# Altium PCB Odin_0.pcbdoc (part 3 of 3)
Units mil, origin at the board's own origin, x right, y up, seen from the top; angles counter-clockwise.
Board outline 3937 x 3937 mil, 4 copper layers (Top Layer, mSIG, mPWR, Bottom Layer), stack 62.3 mil thick; 149 components, 218 nets, 830 pads, 480 vias.
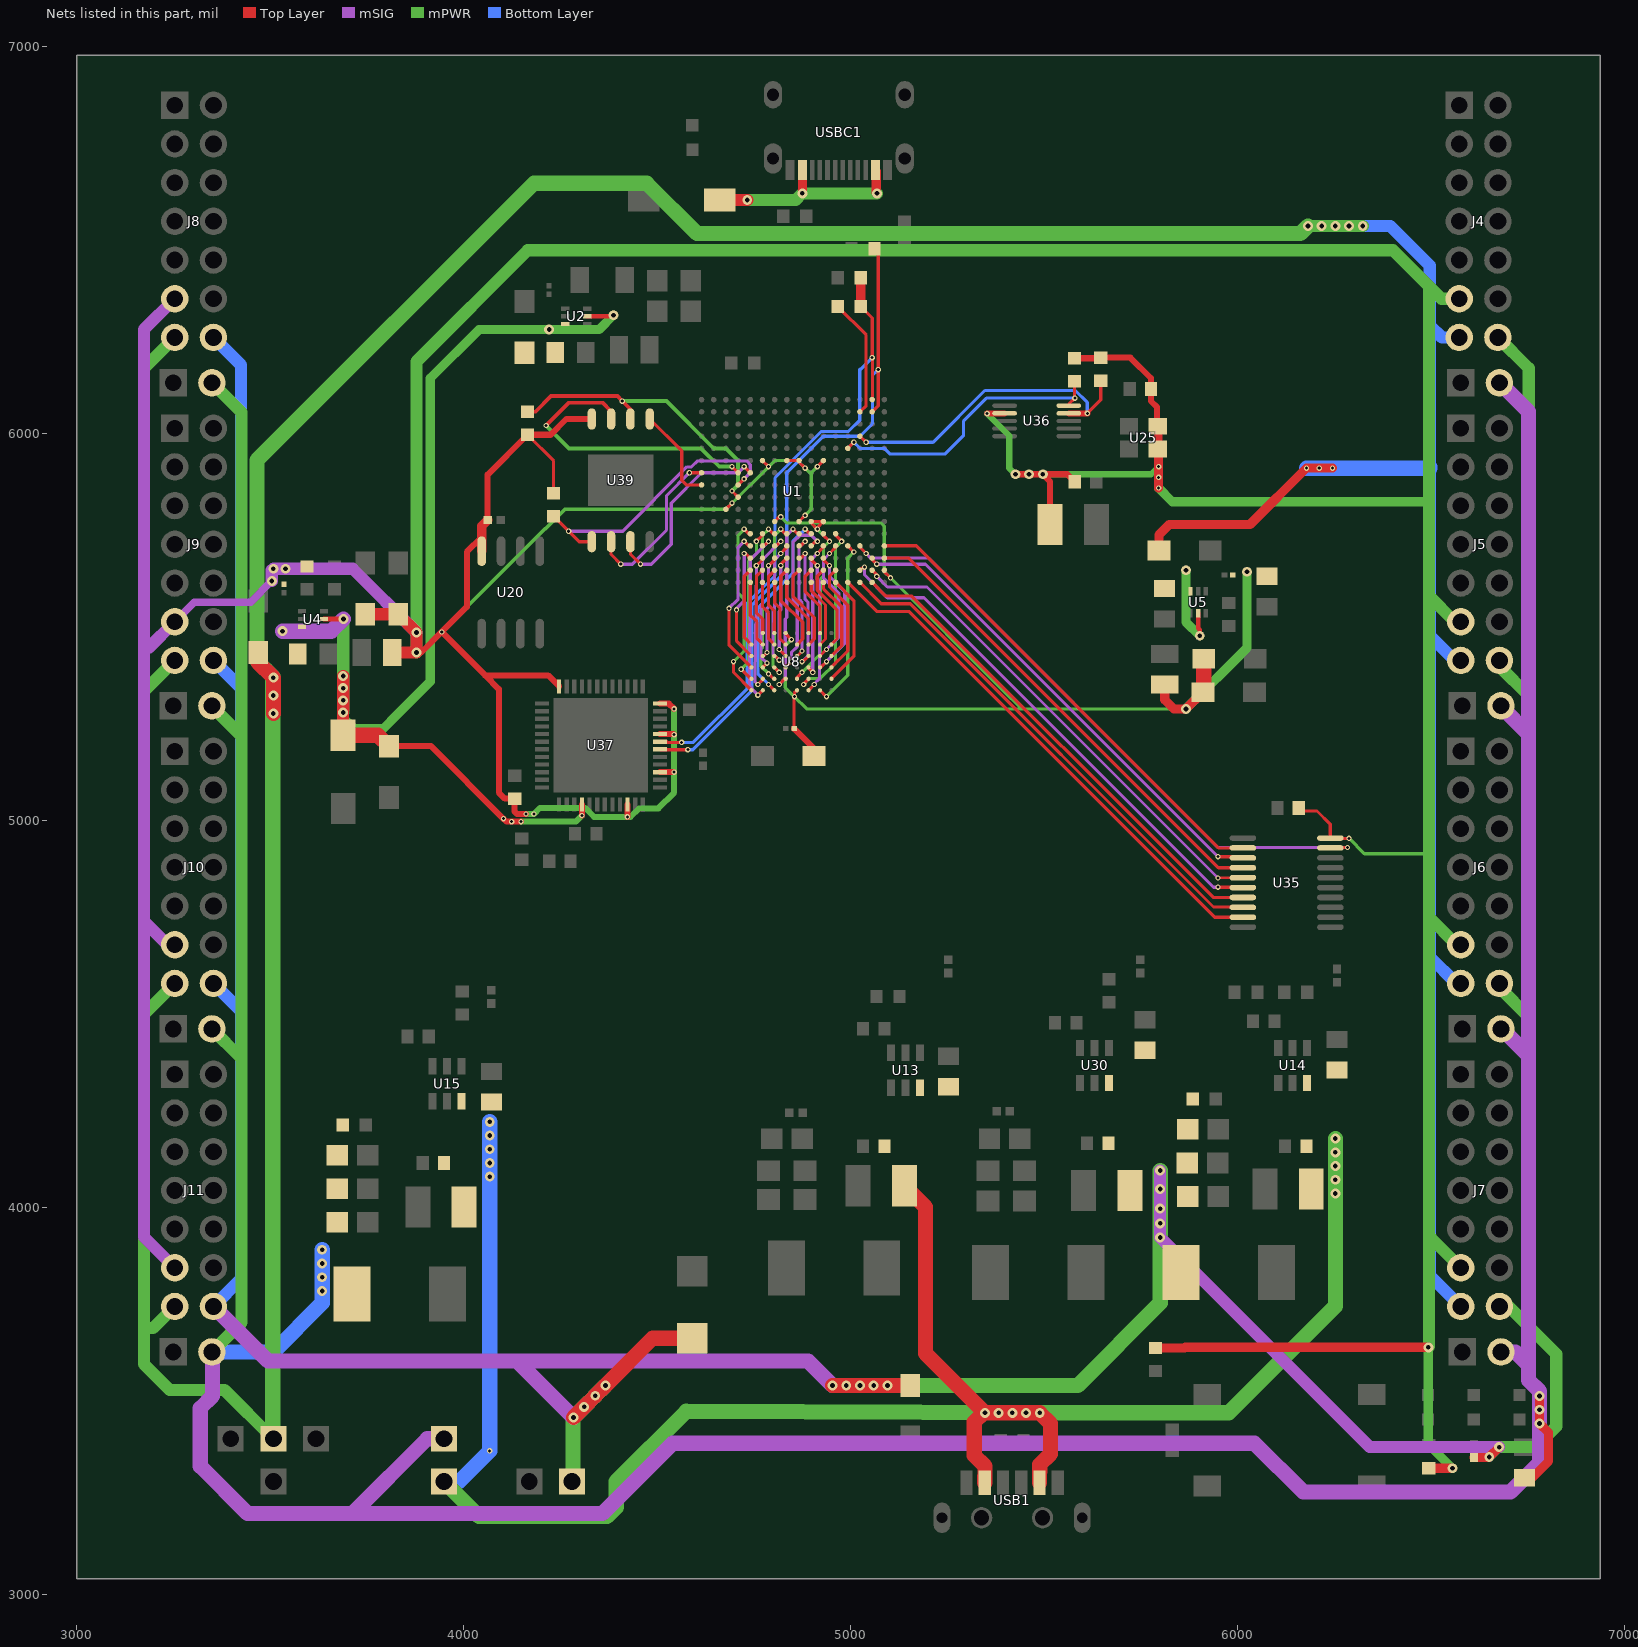
[diagram p5: the nets of this part, all layers, seen from the top]

## Via types
v1: diameter 13.8, hole 7.9, Top Layer to Bottom Layer, 291 vias
v2: diameter 25.6, hole 12.2, Top Layer to Bottom Layer, 176 vias
v3: diameter 24, hole 12, Top Layer to Bottom Layer, 13 vias

## Nets (pads, with @x,y where several pads share a name; then routed paths per layer and width w, separated by ;. In a path a pad name is that pad's centre, name@x,y a point inside that pad or via, vN(x,y) a via of type N, cw(c..) or ccw(c..) an arc to the next point about the centre after c; other vN are vias at no path point) (continued)
P2.5V: C13.1 C14.2 C58.2 C59.1 C60.1 L12.2 R110.2 U1.A15 U1.F11 U1.G11 U1.K11 U8.D6 U8.E1 | length 3152.8
  Top Layer w8.3: U1.K11@4803.2,5773 4815,5784.9 v1(4818.9,5784.9) ; U8.D6@4831.7,5484.7 4831.7,5482.7 v1(4846.4,5467.9) ; C14.2@4853.3,5237.6 4853.3,5319.3 v1(4854.3,5320.3) 4854.3,5330.1 U8.E1@4861.2,5337 ; U1.F11@4929.1,5769.1 4925.2,5773 U1.G11@4897.6,5773 4897.6,5769.1 v1(4913.4,5753.4) 4913.4,5757.3 U1.F11@4929.1,5773 ; U1.A15@5086.6,5647.1 5086.6,5643.2 v1(5102.4,5627.4)
  Top Layer w15.7: C14.2@4853.3,5237.6 4905,5185.9 C13.1@4905,5166.8
  Top Layer w23.6: L12.2@5811,5351.8 5811,5312.4 5834.6,5288.8 v2(5866.1,5288.8) C60.1@5910,5332.1
  Top Layer w39.4: C60.1@5910,5332.1 5912,5334.2 C59.1@5912,5418.7
  mPWR w8.3: v1(4818.9,5784.9) 4834.6,5769.1 5078.7,5769.1 5086.6,5761.3 5086.6,5643.2 v1(5102.4,5627.4) 5389.8,5340 5440.9,5288.8 ; v1(4846.4,5467.9) 4830.7,5452.2 4830.7,5343.9 v1(4854.3,5320.3) 4885.8,5288.8 5440.9,5288.8 ; 4897.9,5769.1 v1(4913.4,5753.4) 4929.2,5737.6 ; v2(5866.1,5288.8) 5440.9,5288.8
  mPWR w23.6: v2(5866.1,5288.8) 6023.6,5446.3 v2(6023.6,5643.1)
P3.3V: C8.1 C9.1 C12.2 C15.2 C73.2 C75.2 C76.2 J4.11 J5.11 J6.11 J7.11 J8.11 J9.11 J10.11 J11.11 L3.2 R3.2 R4.2 R5.2 R10.1 R100.2 R101.2 R106.2 R107.2 R109.2 U1.F6 U1.H6 U1.H11 U1.J6 U1.L6 U1.P10 U20.8 U25.1 U25.4 U35.20 U36.7 U37.3 U37.8 U37.12 U37.24 U37.46 U39.8 | length 18242.8
  Top Layer w8.3: R3.2@4164.5,5997.2 4232,5929.7 R106.2@4232,5846 ; U1.P10@4677.2,5804.5 v1(4692.9,5820.3) ; U1.L6@4771.7,5930.5 v1(4787.4,5914.8) ; U1.J6@4834.6,5930.5 4866.1,5930.5 4866.1,5926.6 v1(4881.9,5910.9) ; U1.H11@4866.1,5773 v1(4881.9,5788.8) ; v1(4913.4,5914.8) U1.F6@4929.1,5930.5 ; C73.2@6157.5,5025 6204.6,5025 6239,4990.7 U35.20@6239,4955.1 6239.9,4954.2 v1(6287.4,4954.2)
  Top Layer w15.7: v2(3877.9,5434.5) 3889.8,5434.5 v1(3942.9,5487.6) ; U20.8@4046.2,5732.6 4007.9,5694.3 4007.9,5552.6 v1(3942.9,5487.6) ; R10.1@4061.7,5777 4061.7,5894.4 R3.2@4164.5,5997.2 4224.2,5997.2 4264.9,6037.9 U39.8@4330.5,6037.9 ; v1(4160.8,5017.1) 4137.8,5017.1 4131.4,5023.5 R107.2@4131.4,5056.9 4105.9,5056.9 4090.5,5072.3 4090.5,5340 4055.1,5375.4 ; U37.24@4246.1,5347 4217.6,5375.4 4055.1,5375.4 ; v1(4422.6,5009.7) 4423.2,5010.3 U37.46@4423.2,5041.7 ; U37.3@4507,5125.4 v1@4543.3,5125.4 ; U37.8@4507,5223.8 4541.7,5223.8 v1(4543.3,5222.3) ; U37.12@4507,5302.6 4529.5,5302.6 v1(4543.3,5288.8) ; v1(5352.4,6051.7) 5396.4,6051.7 U36.7@5397.2,6052.6 ; v2(5425.2,5895.1) v2(5460.6,5895.1) v2(5496.1,5895.1) ; C76.2@5515.1,5765.2 5515.1,5876.1 v2(5496.1,5895.1) ; R101.2@5578,6194.9 5644.2,6194.9 R100.2@5645.7,6196.4 5722.3,6196.4 5775.6,6143.1 C15.2@5775.6,6115.6 5775.6,6084.1 5791.3,6068.3 5791.3,6021.1 U25.1@5793.3,6019.1 ; C75.2@5578.7,5875.4 5559.1,5895.1 v2(5496.1,5895.1) ; v1(3942.9,5487.6) 4055.1,5375.4
  Top Layer w23.6: U20.8@4046.2,5696.4 4046.2,5732.6 4046.2,5761.5 R10.1@4061.7,5777 ; R4.2@5787.4,3637.4 5862.2,3637.4 5864,3639.2 v2(6492.1,3639.2) ; U25.1@5793.3,6019.1 U25.4@5793.3,5960.1 5795.3,5958.1 v1(5795.3,5914.8) v1(5795.3,5887.2) v1(5795.3,5859.7) ; R109.2@6492.6,3326.3 6493.1,3326.8 v2(6554.4,3326.8)
  Top Layer w31.5: C8.1@3745.4,5533.3 C9.1@3830.7,5533.4 v2(3877.9,5486.2) v2(3877.9,5434.5) L3.2@3814.9,5434.5
  mSIG w19.7: J9.11@3253.1,5514 3304,5564.8 3449.3,5564.8 v2(3503.9,5619.5)
  mSIG w31.5: J11.11@3253.1,3844.7 3173.2,3924.6 3173.2,4740.8 ; J10.11@3253.1,4679.4 3234.6,4679.4 3173.2,4740.8 ; J9.11@3253.1,5514 3185.4,5446.3 3173.2,5446.3 ; J8.11@3253.1,6348.6 3252.8,6348.6 3173.2,6269.1 3173.2,5446.3 ; v2(3503.9,5619.5) 3503.9,5647.1 v2(3507.9,5651) v2(3539.4,5651) 3713.1,5651 v2(3877.9,5486.2) ; 3173.2,4740.8 3173.2,5446.3
  mPWR w8.3: v1(4692.9,5820.3) v1@4787.4,5914.7 ; v1(4787.4,5914.8) 4803.1,5930.5 4862.1,5930.5 v1(4881.9,5910.9) 4897.6,5895.1 4897.6,5804.5 v1(4881.9,5788.8) ; 4897.7,5895.1 4897.7,5899.1 v1(4913.4,5914.8) ; v1(6287.4,4954.2) 6327,4914.6 6494.3,4914.6
  mPWR w9.8: v1(3942.9,5487.6) 4209.5,5754.2 4211.4,5754.2 4261.8,5804.5 4677.2,5804.5 v1(4692.9,5820.3)
  mPWR w15.7: v1(4160.8,5017.1) v1(4181.1,5017.1) 4196.8,5032.9 4313.3,5032.9 4336.4,5009.7 v1(4422.6,5009.7) 4430.7,5009.7 4452.9,5031.9 4502.9,5031.9 4543.3,5072.3 v1(4543.3,5125.5) v1(4543.3,5222.3) v1(4543.3,5288.8) ; v1(5352.4,6051.7) 5409.4,5994.6 5409.4,5910.8 v2(5425.2,5895.1) ; v2(5496.1,5895.1) 5775.6,5895.1 v1@5795.2,5914.7
  mPWR w23.6: v1@5795.3,5914.7 v1(5795.3,5887.2) v1(5795.3,5859.7) 5830.7,5824.2 6494.3,5824.2 ; v2(6492.1,3639.2) 6492.1,3389.1 v2(6554.4,3326.8)
  mPWR w31.5: v2(3877.9,5434.5) v2(3877.9,5486.2) 3877.9,6186.5 4165.3,6473.9 6400.7,6473.9 6494.3,6380.3 ; v2(6492.1,3639.2) 6494.3,3641.4 6494.3,3921.2 ; J4.11@6572,6348.6 6525.9,6348.6 6494.3,6380.3 ; J7.11@6576,3844.7 6499.5,3921.2 6494.3,3921.2 ; J6.11@6576,4679.4 6565.3,4679.4 6494.3,4750.4 ; J5.11@6576,5514 6560.6,5514 6494.3,5580.3 ; 6494.3,3921.2 6494.3,4750.4 ; 6494.3,4750.4 6494.3,4914.6 6494.3,5580.3 ; 6494.3,5580.3 6494.3,5824.2 6494.3,6380.3
P5V: C1.1 C3.1 C17.1 C61.1 D5.1 J4.13 J5.13 J6.13 J7.13 J8.13 J9.13 J10.13 J11.13 P5.1 R7.1 R42.1 R43.1 U2.3 U2.5 U4.3 U4.5 U5.3 U5.5 U37.40 | length 16924.1
  Top Layer w11.8: U4.5@3638.7,5521.1 v2(3689,5521.1) ; U2.5@4319.1,6303.1 4383.7,6303.1 v2@4386.5,6305.9 ; U5.5@5897.6,5535.9 5897.6,5497.5 5901.6,5493.5 v2(5901.6,5477.8)
  Top Layer w15.7: C17.1@3806.4,5192.4 3915.3,5192.4 v1(4102.4,5005.3) 4110.2,4997.5 v1(4123.6,4997.5) v1(4147.9,4997.5) ; v1(4305.1,5013.2) U37.40@4305.1,5041.7
  Top Layer w23.6: C61.1@5795.8,5698.3 5795.8,5738.2 5822.8,5765.2 6031.5,5765.2 v1(6177.2,5910.8) v1(6210.4,5910.8) v1(6244.7,5910.8)
  Top Layer w31.5: D5.1@3687.9,5220.7 3688.2,5342.5 v2(3688.3,5374)
  Top Layer w39.4: C3.1@3468.5,5435 3468.5,5409 3507.9,5369.6 3507.9,5323.5 v2@3507.9,5277 ; D5.1@3687.9,5220.6 3778.1,5220.6 C17.1@3806.4,5192.4
  mSIG w39.4: v2(3531.5,5489.6) 3657.5,5489.6 v2(3689,5521.1)
  mPWR w15.7: v1(4147.9,4997.5) 4289.4,4997.5 v1(4305.1,5013.2)
  mPWR w23.6: v2@3688.3,5279.6 3688.3,5265.9 3716.5,5237.6 3791.3,5237.6 3826.8,5273.1 3913.4,5359.7 3913.4,6143.2 4039.4,6269.1 v2(4220.5,6269.1) 4349.7,6269.1 v2@4386.5,6305.9 ; v2(5866.1,5647.1) 5866.1,5513.2 v2(5901.6,5477.8)
  mPWR w31.5: J11.13@3253.1,3744.7 3197.2,3688.8 3173.2,3688.8 ; J10.13@3253.1,4579.4 3173.2,4499.4 ; J9.13@3253.1,5414 3173.2,5334 ; J8.13@3253.1,6248.6 3173.2,6168.7 3173.2,5334 ; P5.1@3506.5,3404.3 3381.9,3529 3240.1,3529 3173.2,3595.9 3173.2,3688.8 ; v2(3688.3,5279.5) v2(3688.3,5311) v2(3688.3,5342.5) v2(3688.3,5374) 3688.3,5520.4 v2(3689,5521.1) ; v2(6181.1,6536.8) v2(6216.5,6536.8) v2(6252,6536.8) v2(6287.4,6536.8) v2(6322.8,6536.8) ; 3173.2,3688.8 3173.2,4499.4 ; 3173.2,4499.4 3173.2,5334
  mPWR w39.4: P5.1@3507.9,3403 3506.5,3404.3 3506.5,5372.3 3465.6,5413.2 3465.6,5931.6 4181.1,6647.1 4472.4,6647.1 4602.4,6517.1 6161.4,6517.1 v2@6181.1,6536.9
  Bottom Layer w31.5: v2(6181.1,6536.8) v2(6216.5,6536.8) v2(6252,6536.8) v2(6287.4,6536.8) v2(6322.8,6536.8) ; v2@6322.8,6536.9 6393.7,6536.9 6496.1,6434.5 6496.1,6280 6527.5,6248.6 J4.13@6572,6248.6 ; 6496.1,5910.8 6496.1,5478.6 ; 6496.1,5913.7 6496.1,6278.6 ; J7.13@6576,3744.7 6496.1,3824.6 6496.1,4648.6 ; J6.13@6576,4579.4 6565.3,4579.4 6496.1,4648.6 ; J5.13@6576,5414 6560.6,5414 6496.1,5478.6 ; 6496.1,4648.6 6496.1,5478.6
  Bottom Layer w39.4: v1(6177.2,5910.8) v1(6210.4,5910.8) v1(6244.7,5910.8) 6496.1,5910.8 6496.1,5913.7
  other v2: 3507.8,5276.9 3507.8,5323.5 3507.8,5369.6 4386.5,6306
P9V: C6.1 C28.1 C43.2 C46.2 C47.2 C64.2 D6.1 J4.14 J5.14 J6.14 J7.14 J8.14 J9.14 J10.14 J11.14 L6.1 P7.1 R16.2 R34.2 R48.2 U30.3 | length 11775.9
  Top Layer w23.6: R34.2@6610.2,3354.4 6648.3,3354.4 v2(6649.6,3355.7) v2(6675.1,3381.3)
  Top Layer w39.4: v2(4283.5,3458.1) v2(4310.9,3485.5) v2(4339.5,3514.1) v2(4366.1,3540.8) 4488.2,3662.8 D6.1@4590.6,3662.8 ; v2(4952.7,3540.8) v2(4988.1,3540.8) v2(5023.6,3540.8) v2(5059,3540.8) v2(5094.5,3540.8) 5150.1,3540.8 C6.1@5153.5,3544.2
  mSIG w8.3: v2(6649.6,3355.7) v2(6675.1,3381.3)
  mSIG w31.5: v2(5799.2,4095.9) v2(5799.2,4048.5) v2(5799.2,3997.4) v2(5799.2,3959.5) v2(5799.2,3922.7) 6340.6,3381.3 v2(6675.1,3381.3)
  mSIG w39.4: J11.14@3353.1,3744.7 3494.1,3603.8 4137.8,3603.8 ; v2(4283.5,3458.1) 4137.8,3603.8 ; v2(5094.5,3540.8) v2(5059,3540.8) v2(5023.6,3540.8) v2(4988.1,3540.8) v2(4952.7,3540.8) 4889.7,3603.8 4137.8,3603.8
  mPWR w23.6: v2(6649.6,3355.7) v2(6675.1,3381.3)
  mPWR w31.5: J4.14@6672,6248.6 6751.7,6168.9 6751.7,5322.9 ; v2(6675.1,3381.3) 6769.6,3381.3 6822.8,3434.4 6822.8,3622 6751.7,3693 ; J7.14@6676,3744.7 6700,3744.7 6751.7,3693 ; J6.14@6676,4579.4 6676,4568.7 6751.7,4493 ; J5.14@6676,5414 6676,5398.6 6751.7,5322.9 ; 6751.7,3693 6751.7,4493 ; 6751.7,4493 6751.7,5322.9
  mPWR w39.4: P7.1@4279.5,3292.7 4281.9,3295.1 4281.9,3456.5 v2(4283.5,3458.1) v2(4310.9,3485.5) v2(4339.5,3514.1) v2(4366.1,3540.8) ; v2(4952.7,3540.8) v2(4988.1,3540.8) v2(5023.6,3540.8) v2(5059,3540.8) v2(5094.5,3540.8) 5586.6,3540.8 5799.2,3753.4 v2(5799.2,3922.7) v2(5799.2,3959.5) v2(5799.2,3997.4) v2(5799.2,4048.5) v2(5799.2,4095.9)
  Bottom Layer w31.5: J11.14@3353.1,3744.7 3424.5,3816.1 3424.5,4508 ; J10.14@3353.1,4579.4 3424.5,4508 ; J9.14@3353.1,5414 3424.5,5342.6 ; J8.14@3353.1,6248.6 3424.5,6177.3 3424.5,5342.6 ; 3424.5,4489.5 3424.5,4508 ; 3424.5,4508 3424.5,5342.6
P12V: C34.1 C48.2 C49.2 H5.2 H6.2 H7.2 H8.2 H9.2 H10.2 H11.2 H12.2 L7.1 P8.1 R103.2 U18.2 | length 10924.8
  Top Layer w23.6: R103.2@6740.6,3302.4 6760.2,3302.4 6803.1,3345.3 6803.1,3418.7 v2(6779.5,3442.3) v2(6779.5,3477.8) v2(6779.5,3513.2)
  mSIG w39.4: H12.2@3349.2,3627.4 3350.4,3626.2 3350.4,3513.2 3318.9,3481.7 3318.9,3332.1 3440.9,3210.1 3712.6,3210.1 ; P8.1@3948.8,3403 3905.5,3403 3712.6,3210.1 ; H8.2@6679.9,3627.4 6717.3,3627.4 6751.3,3593.4 ; H7.2@6679.9,4464.8 6751.3,4393.4 ; H6.2@6679.9,5294.7 6751.3,5223.3 ; H5.2@6679.9,6128.6 6751.3,6057.2 6751.3,5223.3 ; 3712.6,3210.1 4358.3,3210.1 4539.4,3391.2 6043.3,3391.2 6169.3,3265.2 6704.7,3265.2 6779.5,3340 v2(6779.5,3442.3) v2(6779.5,3477.8) 6779.5,3525.8 6751.3,3554.1 6751.3,3593.4 ; 6751.3,3593.4 6751.3,4393.4 ; 6751.3,4393.4 6751.3,5223.3
  mPWR w31.5: H12.2@3349.2,3627.4 3425.2,3703.4 3425.2,4388.8 ; H11.2@3349.2,4462 3422.5,4388.8 3425.2,4388.8 ; H10.2@3349.2,5294.7 3425.2,5218.7 ; H9.2@3349.2,6131.3 3425.2,6055.3 3425.2,5218.7 ; 3425.2,4388.8 3425.2,5218.7
  Bottom Layer w39.4: H12.2@3349.2,3627.4 3507.9,3627.4 3633.9,3753.4 v2(3633.9,3784.9) v2(3633.9,3820.3) v2(3633.9,3855.7) v2(3633.9,3891.2)
QSPI_D2: U1.M7 U39.3 | length 525.5
  Top Layer w8.3: U39.3@4430.5,5720.8 4430.5,5689 v1(4456.7,5662.8) ; v1(4724.4,5914.8) U1.M7@4740.2,5899
  mSIG w8.3: v1(4456.7,5662.8) 4484.2,5662.8 4535.8,5714.4 4535.8,5820.6 4614.2,5899 4708.7,5899 v1(4724.4,5914.8)
QSPI_D3: U1.N7 U39.7 | length 768.2
  Top Layer w8.3: v1(4692.9,5914.8) U1.N7@4708.7,5899
  Top Layer w9.8: v1(4212.6,6021.1) 4271.7,6080.1 4358.3,6080.1 4380.5,6057.9 U39.7@4380.5,6037.9
  mPWR w9.8: v1(4212.6,6021.1) 4271.7,5962 4613,5962 4660.2,5914.8 v1(4692.9,5914.8)
RAM_A0: U1.M13 U8.A3 | length 386.8
  Top Layer w8.3: v1(4685,5548.6) 4685,5454.2 U8.A3@4743.1,5396.1 ; v1(4724.4,5721.9) 4736.2,5710.1 U1.M13@4740.2,5710.1
  mSIG w8.3: v1(4685,5548.6) 4708.7,5572.3 4708.7,5706.1 v1(4724.4,5721.9)
RAM_A1: U1.M14 U8.A4 | length 309.5
  Top Layer w8.3: v1(4704.7,5544.7) 4704.7,5464 U8.A4@4743.1,5425.6 ; v1(4724.4,5690.4) 4728.3,5690.4 U1.M14@4740.2,5678.6
  mSIG w8.3: v1(4704.7,5544.7) 4704.7,5548.6 4724.4,5568.3 v1(4724.4,5690.4)
RAM_A2: U1.M15 U8.A5 | length 206.2
  Top Layer w8.3: U1.M15@4740.2,5647.1 4724.4,5631.3 4724.4,5473.9 U8.A5@4743.1,5455.2
RAM_A3: U1.K13 U8.B3 | length 378.7
  Top Layer w8.3: U8.B3@4772.6,5396.1 v1(4783.5,5406.9) ; U1.K13@4803.2,5710.1 4807.1,5710.1 v1(4818.9,5721.9)
  mSIG w8.3: v1(4783.5,5406.9) 4767.7,5422.7 4767.7,5556.5 4771.7,5560.5 4771.7,5674.7 v1(4818.9,5721.9)
RAM_A4: U1.K14 U8.B4 | length 266.9
  Top Layer w8.3: U8.B4@4772.6,5425.6 4774.6,5425.6 v1(4783.5,5434.5) ; v1(4787.4,5658.9) 4803.2,5674.6 U1.K14@4803.2,5678.6
  mSIG w8.3: v1(4783.5,5434.5) 4783.5,5548.7 4787.4,5552.6 v1(4787.4,5658.9)
RAM_A5: U1.J12 U8.C3 | length 423.6
  Top Layer w8.3: U8.C3@4802.2,5396.1 v1(4815,5383.3) ; v1(4818.9,5753.4) 4830.7,5741.5 U1.J12@4834.6,5741.5
  mPWR w8.3: v1(4815,5383.3) 4799.2,5399.1 4799.2,5450.2 4803.1,5454.2 4803.1,5737.7 v1(4818.9,5753.4)
RAM_A6: U1.J13 U8.C4 | length 333.8
  Top Layer w8.3: U8.C4@4802.2,5425.6 4804.1,5425.6 v1(4815,5414.8) ; v1(4818.9,5690.4) 4834.6,5706.1 U1.J13@4834.6,5710.1
  mSIG w8.3: v1(4815,5414.8) 4799.2,5430.5 4799.2,5544.7 4803.1,5548.6 4803.1,5674.6 v1(4818.9,5690.4)
RAM_A7: U1.J14 U8.D4 | length 268
  Top Layer w8.3: v1(4815,5442.3) U8.D4@4831.7,5425.6 ; v1(4818.9,5658.9) 4818.9,5662.8 U1.J14@4834.6,5678.6
  mSIG w8.3: v1(4815,5442.3) 4815,5540.8 4818.9,5544.7 v1(4818.9,5658.9)
RAM_A8: U1.E16 U8.H2 | length 292.7
  Top Layer w8.3: U8.H2@4949.8,5366.6 5007.9,5424.7 5007.9,5568.3 U1.E16@4960.6,5615.6
RAM_A9: U1.E15 U8.H3 | length 294.5
  Top Layer w8.3: U8.H3@4949.8,5396.1 4992.1,5438.4 4992.1,5556.5 4944.9,5603.8 4944.9,5631.3 U1.E15@4960.6,5647.1
RAM_A10: U1.F16 U8.H4 | length 220.6
  Top Layer w8.3: U1.F16@4929.1,5615.6 4929.1,5599.8 4976.4,5552.6 4976.4,5452.2 U8.H4@4949.8,5425.6
RAM_A11: U1.F15 U8.H5 | length 225.3
  Top Layer w8.3: U1.F15@4929.1,5647.1 4913.4,5631.3 4913.4,5595.9 4964.1,5545.2 4964.1,5469.5 U8.H5@4949.8,5455.2
RAM_A12: U1.F14 U8.G3 | length 332.9
  Top Layer w8.3: U8.G3@4920.3,5396.1 4922.2,5396.1 v1(4937,5410.8) ; U1.F14@4929.1,5678.6 4929.1,5674.6 v1(4944.9,5658.9)
  mSIG w8.3: v1(4937,5410.8) 4984.2,5458.1 4984.2,5591.9 4944.9,5631.3 v1(4944.9,5658.9)
RAM_A13: U1.E13 U8.G4 | length 333.8
  Top Layer w8.3: U8.G4@4920.3,5425.6 v1(4937,5442.3) ; v1(4944.9,5690.4) 4960.6,5706.1 U1.E13@4960.6,5710.1
  mSIG w8.3: v1(4937,5442.3) 4968.5,5473.8 4968.5,5588 4929.1,5627.4 4929.1,5674.6 v1(4944.9,5690.4)
RAM_A14: U1.F13 U8.F3 | length 358.8
  Top Layer w8.3: U8.F3@4890.8,5396.1 4890.8,5394.1 v1(4901.6,5383.3) ; v1(4913.4,5690.4) 4929.1,5706.1 U1.F13@4929.1,5710.1
  mSIG w8.3: v1(4901.6,5383.3) 4901.6,5619.5 4897.6,5623.5 4897.6,5674.6 v1(4913.4,5690.4)
RAM_A15: U1.H14 U8.F4 | length 332.6
  Top Layer w8.3: U1.H14@4866.1,5678.6 4870.1,5678.6 v1(4881.9,5690.4) ; v1(4874,5410.8) 4876,5410.8 U8.F4@4890.8,5425.6
  mSIG w8.3: v1(4874,5410.8) 4889.3,5426.2 4889.3,5564.8 4881.9,5572.3 v1(4881.9,5690.4)
RAM_A16: U1.H13 U8.E4 | length 332.1
  Top Layer w8.3: U8.E4@4861.2,5425.6 v1(4874,5438.4) ; U1.H13@4866.1,5710.1 4870.1,5710.1 v1(4881.9,5721.9)
  mSIG w8.3: v1(4874,5438.4) 4874,5562.8 4870.1,5566.7 4870.1,5568.4 4866.1,5572.3 4866.2,5706.1 v1(4881.9,5721.9)
RAM_A17: U1.G13 U8.D3 | length 437.6
  Top Layer w8.3: U8.D3@4831.7,5396.1 v1(4846.5,5410.9) ; U1.G13@4897.6,5710.1 4909.5,5721.9 v1(4913.4,5721.9)
  mSIG w8.3: v1(4846.5,5410.9) 4846.5,5434.5 4861.7,5449.8 4861.7,5557 4850.4,5568.3 4850.4,5718.7 4869.4,5737.6 4897.6,5737.6 v1(4913.4,5721.9)
RAM_CE#: U1.M16 U8.B5 | length 173.9
  Top Layer w8.3: U1.M16@4740.2,5615.6 4740.2,5531.3 4757.9,5513.6 4757.9,5469.9 U8.B5@4772.6,5455.1
RAM_IO0: U1.L15 U8.B6 | length 176.1
  Top Layer w8.3: U1.L15@4771.7,5647.1 4755.9,5631.3 4755.9,5536.9 4772.6,5521.1 U8.B6@4772.6,5484.7
RAM_IO1: U1.L16 U8.C5 | length 173.1
  Top Layer w8.3: U1.L16@4771.7,5615.6 4771.7,5552.6 4787.4,5536.9 4787.4,5469.9 U8.C5@4802.2,5455.2
RAM_IO2: U1.K15 U8.C6 | length 175.5
  Top Layer w8.3: U8.C6@4802.2,5484.7 4803.1,5540.8 4787.4,5556.5 4787.4,5631.3 U1.K15@4803.2,5647.1
RAM_IO3: U1.K16 U8.D5 | length 172.2
  Top Layer w8.3: U1.K16@4803.2,5615.6 4803.2,5562.4 4816.9,5548.7 4816.9,5470 U8.D5@4831.7,5455.2
RAM_IO4: U1.J15 U8.E5 | length 228.9
  Top Layer w8.3: U1.J15@4834.6,5647.1 4818.9,5631.3 4818.9,5568.3 4876,5513.2 4876,5469.9 U8.E5@4861.2,5455.1
RAM_IO5: U1.H15 U8.F5 | length 227.3
  Top Layer w8.3: U1.H15@4866.1,5647.1 4850.4,5631.3 4850.4,5580.2 4905.5,5525 4905.5,5469.9 U8.F5@4890.8,5455.1
RAM_IO6: U1.J16 U8.F6 | length 154.2
  Top Layer w8.3: U1.J16@4834.6,5615.6 4834.6,5577.2 4890.8,5521.1 U8.F6@4890.8,5484.7
RAM_IO7: U1.G15 U8.G6 | length 184.8
  Top Layer w8.3: U1.G15@4897.6,5647.1 4881.9,5631.3 4881.9,5592 4920.3,5553.6 U8.G6@4920.3,5484.7
RAM_IO8: U1.L13 U8.B1 | length 464.2
  Top Layer w8.3: v1(4759.8,5324.3) U8.B1@4772.6,5337.1 ; U1.L13@4771.7,5710.1 4775.6,5710.1 v1(4787.4,5721.9)
  mSIG w8.3: v1(4759.8,5324.3) 4738.2,5347.9 4740.2,5674.6 v1(4787.4,5721.9)
RAM_IO9: U1.G12 U8.C1 | length 505.2
  Top Layer w8.3: v1(4787.4,5351.8) U8.C1@4802.2,5337.1 ; v1(4881.9,5753.4) 4893.7,5741.5 U1.G12@4897.6,5741.5
  Bottom Layer w8.3: v1(4787.4,5351.8) 4759.8,5379.4 4759.8,5548.7 4850.4,5639.2 4850.4,5721.9 v1(4881.9,5753.4)
RAM_IO10: U1.K12 U8.C2 | length 431.2
  Top Layer w8.3: v1(4787.4,5379.4) 4800.2,5366.6 U8.C2@4802.2,5366.6 ; v1(4787.4,5753.4) 4799.2,5741.5 U1.K12@4803.2,5741.5
  mPWR w8.3: v1(4787.4,5379.4) 4767.7,5399.1 4767.7,5442.4 4771.7,5446.3 4771.7,5737.6 v1(4787.4,5753.4)
RAM_IO11: U1.H12 U8.D2 | length 459.8
  Top Layer w8.3: v1(4815,5351.8) 4829.7,5366.6 U8.D2@4831.7,5366.6 ; v1(4850.4,5753.4) 4862.2,5741.5 U1.H12@4866.1,5741.5
  mSIG w8.3: v1(4815,5351.8) 4830.7,5367.5 4830.7,5521.1 4834.6,5525 4834.6,5737.6 v1(4850.4,5753.4)
RAM_IO12: U1.F12 U8.E2 | length 416.1
  Top Layer w8.3: U8.E2@4861.2,5366.6 4861.2,5370.5 v1(4874,5383.3) ; U1.F12@4929.1,5741.5 4929.1,5737.6 v1(4944.9,5721.9)
  mPWR w8.3: v1(4874,5383.3) 4921.3,5430.6 4921.3,5623.5 4929.1,5631.3 4929.1,5706.1 v1(4944.9,5721.9)
RAM_IO13: U1.E12 U8.F2 | length 473.4
  Top Layer w8.3: v1(4877.9,5351.8) 4877.9,5353.8 U8.F2@4890.8,5366.6 ; U1.E12@4960.6,5741.5 4960.6,5737.6 v1(4976.4,5721.9)
  mPWR w8.3: v1(4877.9,5351.8) 4893.7,5367.6 4921.3,5367.6 4960.6,5406.9 4960.6,5706.1 v1(4976.4,5721.9)
RAM_IO14: U1.G14 U8.F1 | length 363.2
  Top Layer w8.3: U8.F1@4890.8,5337.1 v1(4905.5,5351.8) ; U1.G14@4897.6,5678.6 4897.6,5674.6 v1(4913.4,5658.9)
  mSIG w8.3: v1@4903.5,5351.8 4919.3,5367.6 4919.3,5617.6 4913.4,5623.5 v1(4913.4,5658.9)
RAM_IO15: U1.D13 U8.G1 | length 449.3
  Top Layer w8.3: U8.G1@4920.3,5337 v1(4937,5320.3) ; U1.D13@4992.2,5710.1 v1(5007.9,5694.3)
  mPWR w8.3: v1(4937,5320.3) 4992.1,5375.4 4992.1,5678.5 v1(5007.9,5694.3)
RAM_LB#: U1.M12 U8.A1 | length 480.2
  Top Layer w8.3: v1(4696.9,5410.8) 4696.9,5383.3 U8.A1@4743.1,5337 ; v1(4724.4,5753.4) 4736.2,5741.5 U1.M12@4740.2,5741.5
  mPWR w8.3: v1(4696.9,5410.8) 4724,5438 4724,5572.6 4708.7,5588 4708.7,5737.6 v1(4724.4,5753.4)
RAM_OE#: U1.L12 U8.A2 | length 410
  Top Layer w8.3: v1(4716.5,5391.2) 4741.1,5366.6 U8.A2@4743.1,5366.6 ; v1(4755.9,5721.9) 4771.7,5737.6 U1.L12@4771.7,5741.5
  mPWR w8.3: v1(4716.5,5391.2) 4736.2,5410.9 4736.2,5670.7 4755.9,5690.4 v1(4755.9,5721.9)
RAM_UB#: U1.L14 U8.B2 | length 356.7
  Top Layer w8.3: v1(4755.9,5658.9) 4771.7,5674.6 U1.L14@4771.7,5678.6 ; v1(4759.8,5351.8) 4772.6,5364.6 U8.B2@4772.6,5366.6
  mSIG w8.3: v1(4755.9,5658.9) 4752,5359.7 v1(4759.8,5351.8)
RAM_WE#: U1.G16 U8.G5 | length 181.7
  Top Layer w8.3: U1.G16@4897.6,5615.6 4897.6,5594.3 4934.6,5557.3 4934.6,5469.5 U8.G5@4920.3,5455.1
S1_CLK/SDA: R101.1 U1.D5 U36.5 | length 757.4
  Top Layer w8.3: U1.D5@4992.1,5962 v1(5007.9,5977.8) ; U36.5@5563.4,6072.3 5563.4,6076.6 v1(5578.7,6091.9) 5578,6092.7 R101.1@5578,6135.6
  Bottom Layer w8.3: v1(5007.9,5977.8) 5023.6,5962 5086.6,5962.1 5101.6,5947.1 5242.4,5947.1 5291.3,5996 5291.3,6032.9 5350.4,6091.9 v1(5578.7,6091.9)
S2_CLK/SCL: R100.1 U1.C4 U36.4 | length 836.8
  Top Layer w8.3: U1.C4@5023.6,5993.5 v1(5039.4,5977.8) ; v1(5611.1,6052.6) 5645.7,6087.1 R100.1@5645.7,6137.1
  Top Layer w15.7: U36.4@5563.4,6052.6 v1(5611.1,6052.6)
  Bottom Layer w8.3: v1(5039.4,5977.8) 5212.6,5977.8 5346.5,6111.6 5580.2,6111.6 5611.1,6080.7 v1(5611.1,6052.6)
SPI_CONFIG_CS: R106.1 U1.N8 U39.1 | length 740
  Top Layer w8.3: R106.1@4232,5786.7 v1(4270.9,5747.9) 4297.9,5720.8 U39.1@4330.5,5720.8 ; U1.N8@4708.7,5867.6 v1(4724.4,5883.3)
  mSIG w8.3: v1(4270.9,5747.9) 4410.4,5747.9 4576.5,5914 4588.2,5914 4603.9,5929.7 4730.6,5929.7 4740.2,5920.2 4740.2,5899 v1(4724.4,5883.3)
SPI_CONFIG_MISO: U1.T7 U39.2 | length 427.1
  Top Layer w8.3: U39.2@4380.5,5720.8 4380.5,5687.8 v1(4405.5,5662.8)
  Top Layer w9.8: v1(4582.7,5899) U1.T7@4614.2,5899
  mSIG w8.3: v1(4405.5,5662.8) 4435.6,5662.8 4523.6,5750.9 4523.6,5840 v1(4582.7,5899)
SPI_CONFIG_MOSI: U1.T8 U39.5 | length 248.8
  Top Layer w8.3: U39.5@4480.5,6037.9 4563,5955.4 4563,5879.4 4574.8,5867.5 U1.T8@4614.2,5867.5
SPI_CONFIG_SCK: R3.1 U1.N9 U39.6 | length 792.6
  Top Layer w8.3: v1(4692.9,5851.8) U1.N9@4708.7,5836
  Top Layer w9.8: R3.1@4164.5,6056.5 4184.9,6056.5 4225.4,6097 4396.7,6097 4409.5,6084.1 4430.5,6063.2 U39.6@4430.5,6037.9
  mPWR w9.8: v1(4409.4,6084.1) 4523.6,6084.1 4645.7,5962 4677.2,5962 4708.7,5930.5 4708.7,5867.5 v1(4692.9,5851.8)
TOL_A1: U1.A13 U35.2 | length 1249.6
  Top Layer w8.3: U1.A13@5086.6,5710.1 5169.2,5710.1 5949.8,4929.5 U35.2@6012.9,4929.5
TOL_A2: U1.B14 U35.3 | length 1281
  Top Layer w8.3: U1.B14@5055.1,5678.6 5055.1,5674.6 v1(5066.9,5662.8) ; v1(5948.8,4906.9) 6009.9,4906.9 U35.3@6012.9,4903.9
  mSIG w8.3: v1(5066.9,5662.8) 5192.9,5662.8 v1(5948.8,4906.9)
TOL_A3: U1.A14 U35.4 | length 1257.8
  Top Layer w8.3: U1.A14@5086.6,5678.6 5149.5,5678.6 5949.8,4878.3 U35.4@6012.9,4878.3
TOL_A4: U1.B15 U35.5 | length 1289.5
  Top Layer w8.3: U1.B15@5055.1,5647.1 5066.9,5635.3 v1(5066.9,5631.3) ; v1(5948.8,4851.8) U35.5@6012.9,4852.8
  mSIG w8.3: v1(5066.9,5631.3) 5094.5,5603.8 5196.8,5603.8 v1(5948.8,4851.8)
TOL_A5: U1.C15 U35.6 | length 1347
  Top Layer w8.3: U1.C15@5023.6,5647.1 5031.5,5654.9 v1(5035.4,5654.9) ; v1(5948.8,4828.2) 6011.9,4828.2 U35.6@6012.9,4827.1
  mSIG w8.3: v1@5035.4,5655 5035.4,5635.3 5094.5,5576.2 5189,5576.2 5937,4828.2 v1(5948.8,4828.2)
TOL_A6: U1.B16 U35.7 | length 1295
  Top Layer w8.3: U1.B16@5055.1,5615.6 5090.5,5580.2 5157.5,5580.2 5936.1,4801.6 U35.7@6012.9,4801.6
TOL_A7: U1.C16 U35.8 | length 1337.1
  Top Layer w8.3: U1.C16@5023.6,5615.6 5078.7,5560.5 5153.5,5560.5 5937,4777 6011.9,4777 U35.8@6012.9,4776
TOL_A8: U1.D16 U35.9 | length 1379.2
  Top Layer w8.3: U1.D16@4992.1,5615.6 5066.9,5540.8 5149.6,5540.8 5940,4750.4 U35.9@6012.9,4750.4
TOL_OE#: U1.C13 U35.19 | length 1630.1
  Top Layer w8.3: U1.C13@5023.6,5710.1 5023.6,5706.1 v1(5039.4,5690.4) ; U35.19@6239,4929.5 6240,4930.5 v1(6283.5,4930.5)
  mSIG w8.3: v1(5039.4,5690.4) 5051.2,5678.6 5200.8,5678.6 5948.8,4930.5 v1(6283.5,4930.5)
U2_4: 
USB_DN: R23.1 U1.B2 U37.6 | length 1752.7
  Top Layer w8.3: U37.6@4507,5184.5 4508,5183.5 v1(4578.7,5183.5) ; U1.B2@5055.1,6056.5 5070.9,6072.2 v1(5070.9,6165.4) 5070.9,6468.1 R23.1@5061.1,6477.8
  Bottom Layer w8.3: v1(4578.7,5183.5) 4591.5,5183.5 4744.1,5336 4744.1,5556.5 4834.6,5647.1 4834.6,5899 4929.1,5993.5 5023.6,5993.5 5056,6025.9 5056,6150.5 v1(5070.9,6165.4)
USB_DP: R11.1 R12.2 U1.B1 U37.7 | length 1642.1
  Top Layer w8.3: U37.7@4507,5204.2 4524.1,5204.2 4526.1,5202.2 v1(4563,5202.2) ; R12.2@5025.7,6328.2 5055.1,6298.8 v1(5055.1,6196.3) 5055.9,6195.5 5055.9,6088.8 U1.B1@5055.1,6088
  Top Layer w23.6: R12.2@5025.7,6328.2 R11.1@5025.7,6403
  Bottom Layer w8.3: v1(4563,5202.2) 4593,5202.2 4731.9,5341.1 4731.9,5561.6 4804,5633.6 4804,5885.6 4924.1,6005.7 4993.9,6005.7 5023.1,6034.9 5023.1,6166 5023.9,6166.8 5025.5,6166.8 v1(5055.1,6196.3)
USB_PULLUP: R12.1 U1.C2 | length 308.5
  Top Layer w8.3: R12.1@4966.4,6328.2 5039.4,6255.2 5039.4,6143.1 5039.4,6072.2 U1.C2@5023.6,6056.5
VDATA: D14.1 USBC1.A4 USBC1.A9 USBC1.B4 USBC1.B9 | length 667.8
  Top Layer w8.3: USBC1.A9@4868.8,6681 4868.8,6638.6 4880.6,6638.6 USBC1.B4@4880.6,6681
  Top Layer w11.8: USBC1.B9@5057.8,6680.9 5059.8,6679 5059.8,6632.7 5071.6,6632.7 5071.6,6679 USBC1.A4@5069.6,6681
  Top Layer w23.6: v2(4874.7,6620.9) 4874.7,6656.3 ; v2@5065.4,6632.7 5065.4,6623.1 v2(5067.6,6620.9)
  Top Layer w31.5: D14.1@4661.6,6603.8 v2(4732.3,6603.8)
  mPWR w31.5: v2(4732.3,6603.8) 4857.6,6603.8 v2(4874.7,6620.9) v2(5067.6,6620.9)
VWALL: C22.2 C33.2 C39.2 C40.2 C41.2 C42.2 P9.1 R13.2 R22.2 R27.2 U13.3 U14.3 U15.3 USB1.A9 USB1.B9 | length 5264.1
  Top Layer w39.4: C40.2@5138.5,4056.5 5192.9,4002 5192.9,3871.4 5192.9,3623.4 5346.5,3469.9 v2(5381.9,3469.9) v2(5417.3,3469.9) v2@5452.7,3469.9 ; USB1.B9@5345.7,3289.4 5346.5,3332.1 5318.9,3359.7 5318.9,3446.3 5342.5,3469.9 v2(5346.4,3469.9) ; v2(5452.8,3469.9) v2(5488.2,3469.9) 5515.7,3442.4 5515.7,3363.6 5488.2,3336.1 USB1.A9@5487.5,3289.4
  mPWR w39.4: P9.1@3948.8,3292.8 4039.4,3202.2 4370.1,3202.2 4393.7,3225.8 4393.7,3292.8 ; 4393.7,3292.7 4574.8,3473.8 v2(5488.2,3469.9) 5976.3,3469.9 6252,3745.5 v2(6252,4036.8) v2(6252,4072.2) v2(6252,4107.6) v2(6252,4143.1) v2(6252,4178.5)
  Bottom Layer w39.4: P9.1@3948.8,3292.8 3988.2,3292.8 v1(4066.9,3371.5) v2@4066.9,4080.2 ; v2(4066.9,4080.1) v2(4066.9,4115.6) v2(4066.9,4151) v2(4066.9,4186.4) v2(4066.9,4221.9)
pads on no net: SW1.2 SW1.4 U1.A2 U1.A7 U1.A16 U1.D2 U1.D4 U1.D8 U1.D10 U1.D12 U1.D15 U1.E4 U1.E5 U1.E6 U1.E7 U1.E8 U1.E9 U1.E10 U1.E11 U1.F4 U1.F5 U1.F7 U1.F8 U1.F9 U1.F10 U1.G3 U1.G4 U1.G5 U1.G7 U1.G8 U1.G9 U1.G10 U1.H1 U1.H3 U1.H4 U1.H5 U1.H7 U1.H8 U1.H9 U1.H10 U1.H16 U1.J2 U1.J3 U1.J4 U1.J5 U1.J7 U1.J8 U1.J9 U1.J10 U1.J11 U1.K3 U1.K4 U1.K5 U1.K6 U1.K7 U1.K8 U1.K9 U1.K10 U1.L3 U1.L4 U1.L5 U1.L7 U1.L8 U1.L9 U1.L10 U1.L11 U1.M1 U1.M2 U1.M4 U1.M6 U1.M11 U1.N2 U1.N4 U1.N6 U1.N13 U1.N15 U1.P5 U1.P6 U1.P9 U1.P11 U1.R2 U1.R3 U1.R5 U1.T1 U1.T5 U1.T9 U1.T12 U1.T16 U8.A6 U8.E3 U8.G2 U8.H1 U8.H6 U37.1 U37.2 U37.17 U37.18 U37.19 U37.20 U37.21 U37.25 U37.26 U37.27 U37.28 U37.29 U37.30 U37.31 U37.32 U37.33 U37.49
copper on no net: | length 44.5
  Top Layer w8.3: 4866.2,6025 4881.9,6009.3 ; 4897.6,6025 4913.4,6009.3
  other v3: 4315,5154.9 4354.3,5154.9 4393.7,5154.9 4315,5194.3 4354.3,5194.3 4393.7,5194.3 4315,5233.7 4354.3,5233.7 4393.7,5233.7

## Polygon pours and split planes (outlines as drawn)
GND on Bottom Layer (solid, remove dead copper, pour order 44): 6897.6,6938.4 6897.6,3080.1 3039.4,3080.1 3039.4,6938.4
GND on Top Layer (solid, remove dead copper, pour order 0): 5114.2,4359.6 5114.2,4206.1 5055.1,4206.1 5055.1,3989.5 5051.2,3985.6 4838.6,3985.6 4842.5,3989.5 4842.5,4135.2 4917.3,4135.2 4917.3,4560.4 4952.8,4595.8 5078.2,4595.8 5078.2,4501.3 4996.1,4501.3 4992.1,4497.4 4992.1,4359.6
24VTO5V on Top Layer (solid, remove dead copper, pour order 4): 4921.3,3965.9 4921.3,3702.1 4700.8,3702.1 4700.8,4276.9 4854.3,4276.9 4854.3,4213.9 4830.7,4213.9 4830.7,3969.9 4917.3,3969.9
GND on Top Layer (solid, remove dead copper, pour order 6): 6086.6,4021 6011.8,4021 5992.1,4005.3 5925.2,4005.3 5921.3,4139.1 5992.1,4139.1 5992.1,4324.2 5948.8,4363.6 5948.8,4572.2 6000,4572.2 6000,4528.9 6007.9,4517.1 6007.9,4442.3 6019.7,4442.3 6019.7,4375.4 6074.8,4375.4 6074.8,4336 6110.2,4336 6110.2,4213.9 6129.9,4194.3 6129.9,4139.1 6086.6,4111.6
P12V on Top Layer (solid, remove dead copper, pour order 8): 3795.3,3674.6 3795.3,3899 3712.6,3899 3712.6,4277 3618.1,4277 3618.1,3674.6
GND on Top Layer (solid, remove dead copper, pour order 10): 3921.3,3934.5 3921.3,4237.6 3929.1,4249.4 3929.1,4296.7 3818.9,4296.7 3818.9,4406.9 3779.5,4406.9 3779.5,4395.1 3779.5,4186.4 3799.2,4166.8 3799.2,4076.2 3720.5,4076.2 3720.5,3934.5
9VTO5V on Top Layer (solid, remove dead copper, pour order 12): 5385.8,3725.8 5385.8,4280.9 5354.3,4280.9 5299.2,4190.3 5299.2,4084 5236.2,3981.7 5240.2,3725.8
GND on Top Layer (solid, remove dead copper, pour order 14): 5618.1,4017.1 5618.1,4111.6 5618.1,4194.3 5602.4,4221.8 5602.4,4343.9 5500,4343.9 5500,4422.6 5444.9,4422.6 5444.9,4257.3 5484.3,4225.8 5484.3,4135.2 5421.3,4135.2 5421.3,3989.5 5503.9,3989.5 5559.1,4017.1
P9V on Top Layer (solid, remove dead copper, pour order 16): 5893.7,4292.7 5893.7,4249.4 5885.8,4237.6 5885.8,3981.7 5878,3965.9 5878,3796.6 5783.5,3796.6 5783.5,4292.7
P5V on Top Layer (solid, remove dead copper, pour order 18): 4274.9,6287.4 4274.9,6251.9 4251.3,6251.9 4255.2,6161.4 4109.5,6161.4 4110.2,6257.3 4200.8,6257.3 4200.8,6284.9
U2_4 on Top Layer (solid, remove dead copper, pour order 20): 4306.4,6287.4 4424.5,6287.4 4424.5,6196.8 4353.6,6196.8 4353.6,6255.9 4330,6255.9 4306.4,6255.9 4306.4,6271.6
P5V on Top Layer (solid, remove dead copper, pour order 22): 5881.9,5580.1 5783.5,5580.1 5783.5,5674.6 5767.7,5674.6 5767.7,5721.9 5881.9,5721.9
P2.5V on Top Layer (solid, remove dead copper, pour order 24): 5976.4,5610.2 6106.3,5610.2 6106.3,5667.2 6007.9,5667.2 6007.9,5643.1 5976.4,5643.1
GND on Top Layer (solid, remove dead copper, pour order 26): 5083.4,6707.5 5083.4,6617 5177.9,6617 5177.9,6640.6 5193.6,6640.6 5193.6,6766.6 5126.7,6766.6 5126.7,6735.1 5110.9,6735.1 5110.9,6707.5
P3.3V on Top Layer (solid, remove dead copper, pour order 28): 3531.5,5603.8 3555.1,5603.8 3563,5611.6 3563,5639.2 3610.2,5639.2 3610.2,5670.7 3488.2,5670.7 3488.2,5603.8
P5V on Top Layer (solid, remove dead copper, pour order 30): 3590.6,5505.3 3570.9,5505.3 3555.1,5505.3 3511.8,5505.3 3511.8,5462 3500,5462 3444.9,5462 3444.9,5418.7 3547.2,5418.7 3547.2,5414.8 3586.6,5414.8 3586.6,5462 3590.6,5473.8
L3_1 on Top Layer (solid, remove dead copper, pour order 32): 3752,5414.8 3689,5414.8 3689,5469.9 3681.1,5473.8 3629.9,5473.8 3629.9,5505.3 3696.8,5505.3 3712.6,5489.6 3752,5489.6
VWALL on Top Layer (solid, remove dead copper, pour order 34): 6267.7,4021 6169.3,4021 6169.3,4336 6189,4336 6212.6,4367.5 6271.7,4367.5
24VTO5V on Top Layer (solid, remove dead copper, pour order 2): 4830.7,4213.9 4830.7,3971.9 4728.4,4276.9 4854.3,4276.9 4854.3,4213.9
P9V on Top Layer (solid, remove dead copper, pour order 36): 5700.8,3981.7 5791.3,3891.1 5791.3,4418.7 5708.7,4418.7 5708.7,4351.8 5689,4336 5661.4,4336 5661.4,4210 5653.6,4202.1 5653.6,4143.1 5700.8,4095.8
VWALL on Top Layer (solid, remove dead copper, pour order 38): 5169.3,4332.1 5169.3,4288.8 5157.5,4277 5157.5,4182.5 5114.2,4182.5 5102.4,4170.7 5074.8,4170.7 5074.8,4143.1 5102.4,4111.6 5122,4092 5122,4005.3 5212.6,4005.3 5267.7,4068.3 5267.7,4332.1
VWALL on Top Layer (solid, remove dead copper, pour order 40): 3984.3,3973.8 4086.6,3973.8 4086.6,4284.9 4027.6,4284.9 4023.6,4288.8 3988.2,4288.8 3984.3,4154.9 3964.6,4131.3 3937,4131.3 3937,4099.8 3984.3,4048.6
no net on Top Layer (solid, remove dead copper, pour order 42): 4232.3,5316.4 4232.3,5072.2 4476.4,5072.2 4476.4,5316.4

## Keep-outs
Bottom Layer:
  region: 5023.6,5800.6 5023.6,5615.6 5129,5615.6 5129,5800.6
  region: 4850.4,5753.4 4850.4,5647.1 5023.6,5647.1 5023.6,5753.4
  region: 4960.6,5930.5 4960.6,5836 5023.6,5836 5023.6,5930.5
  region: 4992.1,5836 4992.1,5773 5055.1,5773 5055.1,5836
  region: 5023.6,5898.2 5023.6,5836 5055.1,5836 5055.1,5898.2
  region: 5023.6,6196.5 5023.6,6025 5070.9,6025 5070.9,6196.5
  region: 4708.7,5773 4708.7,5645.6 4804,5645.6 4804,5773
  region: 4629.9,5757.3 4629.9,5647.1 4706.9,5647.1 4706.9,5757.3
  region: 4629.9,5883.3 4629.9,5820.3 4692.9,5820.3 4692.9,5883.3
  region: 4661.4,5914.8 4661.4,5883.3 4724.4,5883.3 4724.4,5914.8
  region: 4582.7,5930.5 4582.7,5851.8 4661.4,5851.8 4661.4,5930.5
Board Outline Layer:
  the board outline again, w10

## Silkscreen, mask and mechanical layers (free items; w line width, h text height)
Top Silkscreen Layer:
  text "RHIT ECE 2025 / AdaCore" at 4771.6,4846.1 h80
  text "3.3V" at 6527.6,3556.5 h80 r90
  text "5V INPUT" at 3551.8,3469.5 h80 r90
  text "9V" at 3444.9,3466 h80 r90
  text "DATA" at 3665.3,3466 h80 r90
  text "BATTERY" at 4220.5,3359.7 h80 r90
  text "9V ONLY" at 4322.8,3359.7 h80 r90
  text "WALL" at 3566.9,3249.4 h80
  text "BYPASS" at 4090.6,3245.5 h80 r90
  text "12V" at 3901.6,3237.6 h80 r90
  text "9V" at 6653.5,3202.2 h80 r90
  text "12V" at 6771.6,3170.7 h80 r90
  text "+" at 4248,3135.3 h120
  text "-" at 4133.8,3134.3 h120
  text "3.3V" at 6535.4,3127.4 h80 r90